# Altium PCB bmsSlavePCB_R.PcbDoc (part 1 of 3)
Units mm, origin at the board's own origin, x right, y up, seen from the top; angles counter-clockwise.
Board outline 161.93 x 135.51 mm, 2 copper layers (Top Layer, Bottom Layer); 207 components, 152 nets, 533 pads, 59 vias.
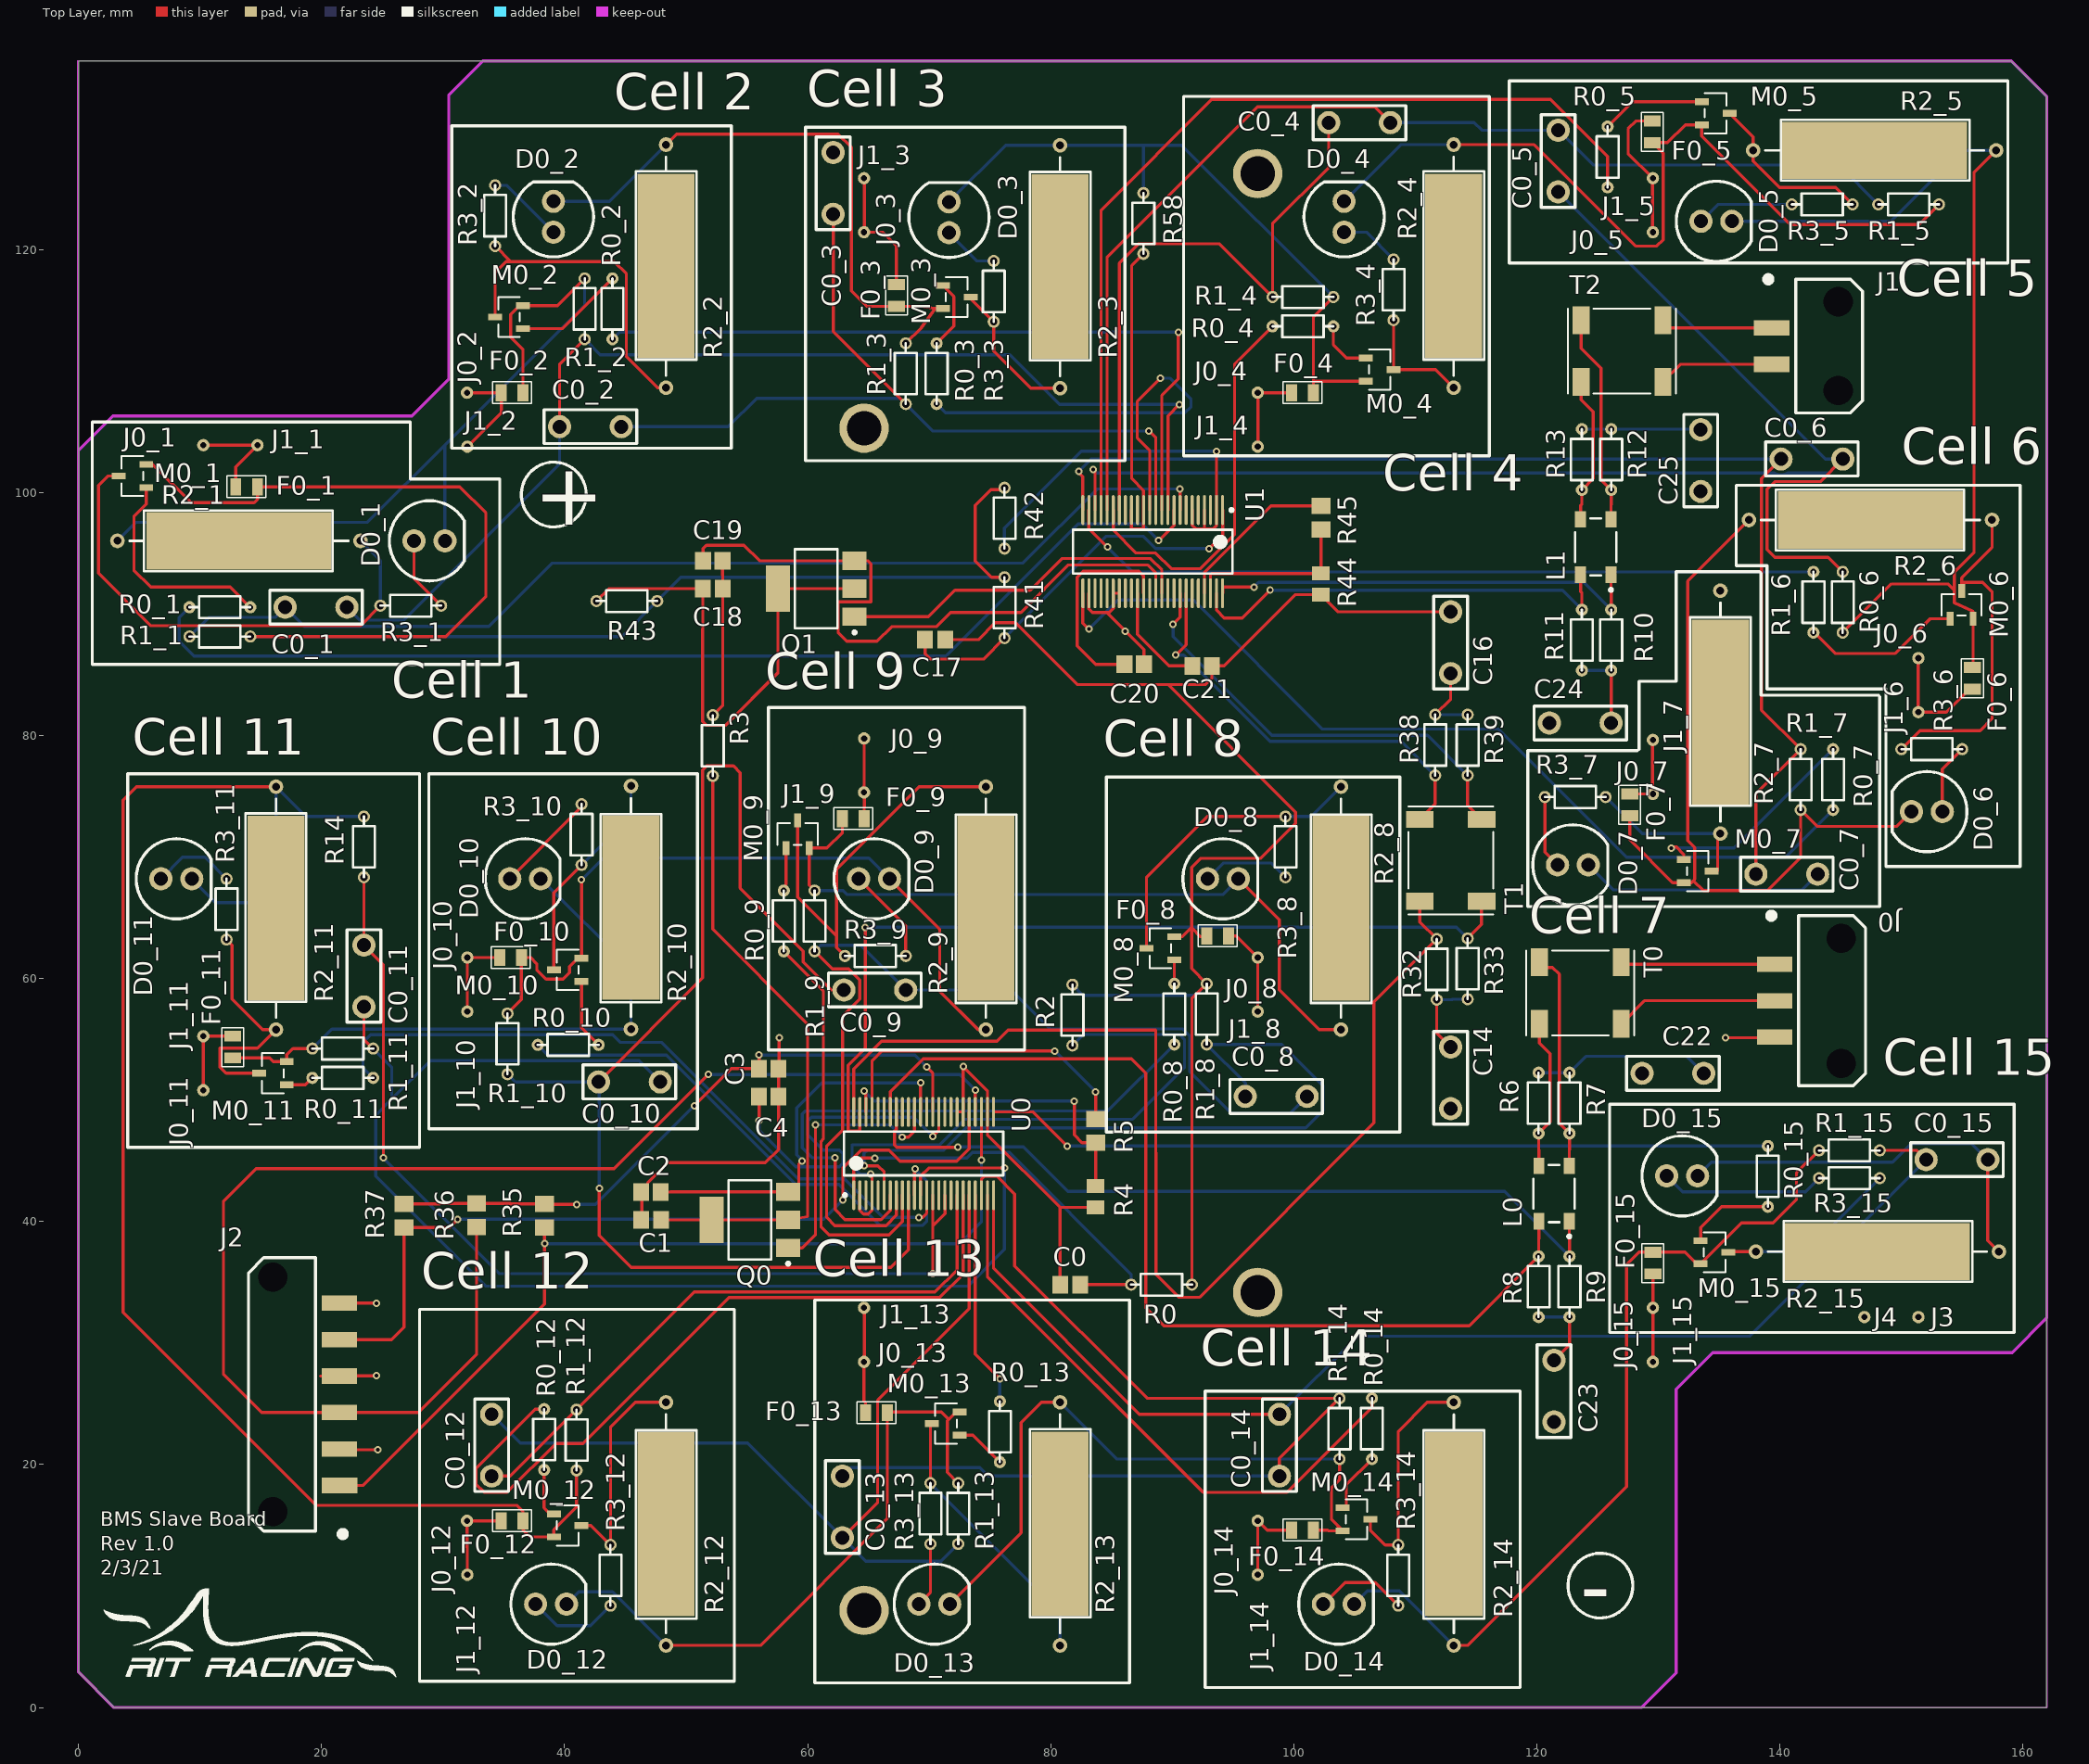
[diagram p0: Top Layer view]
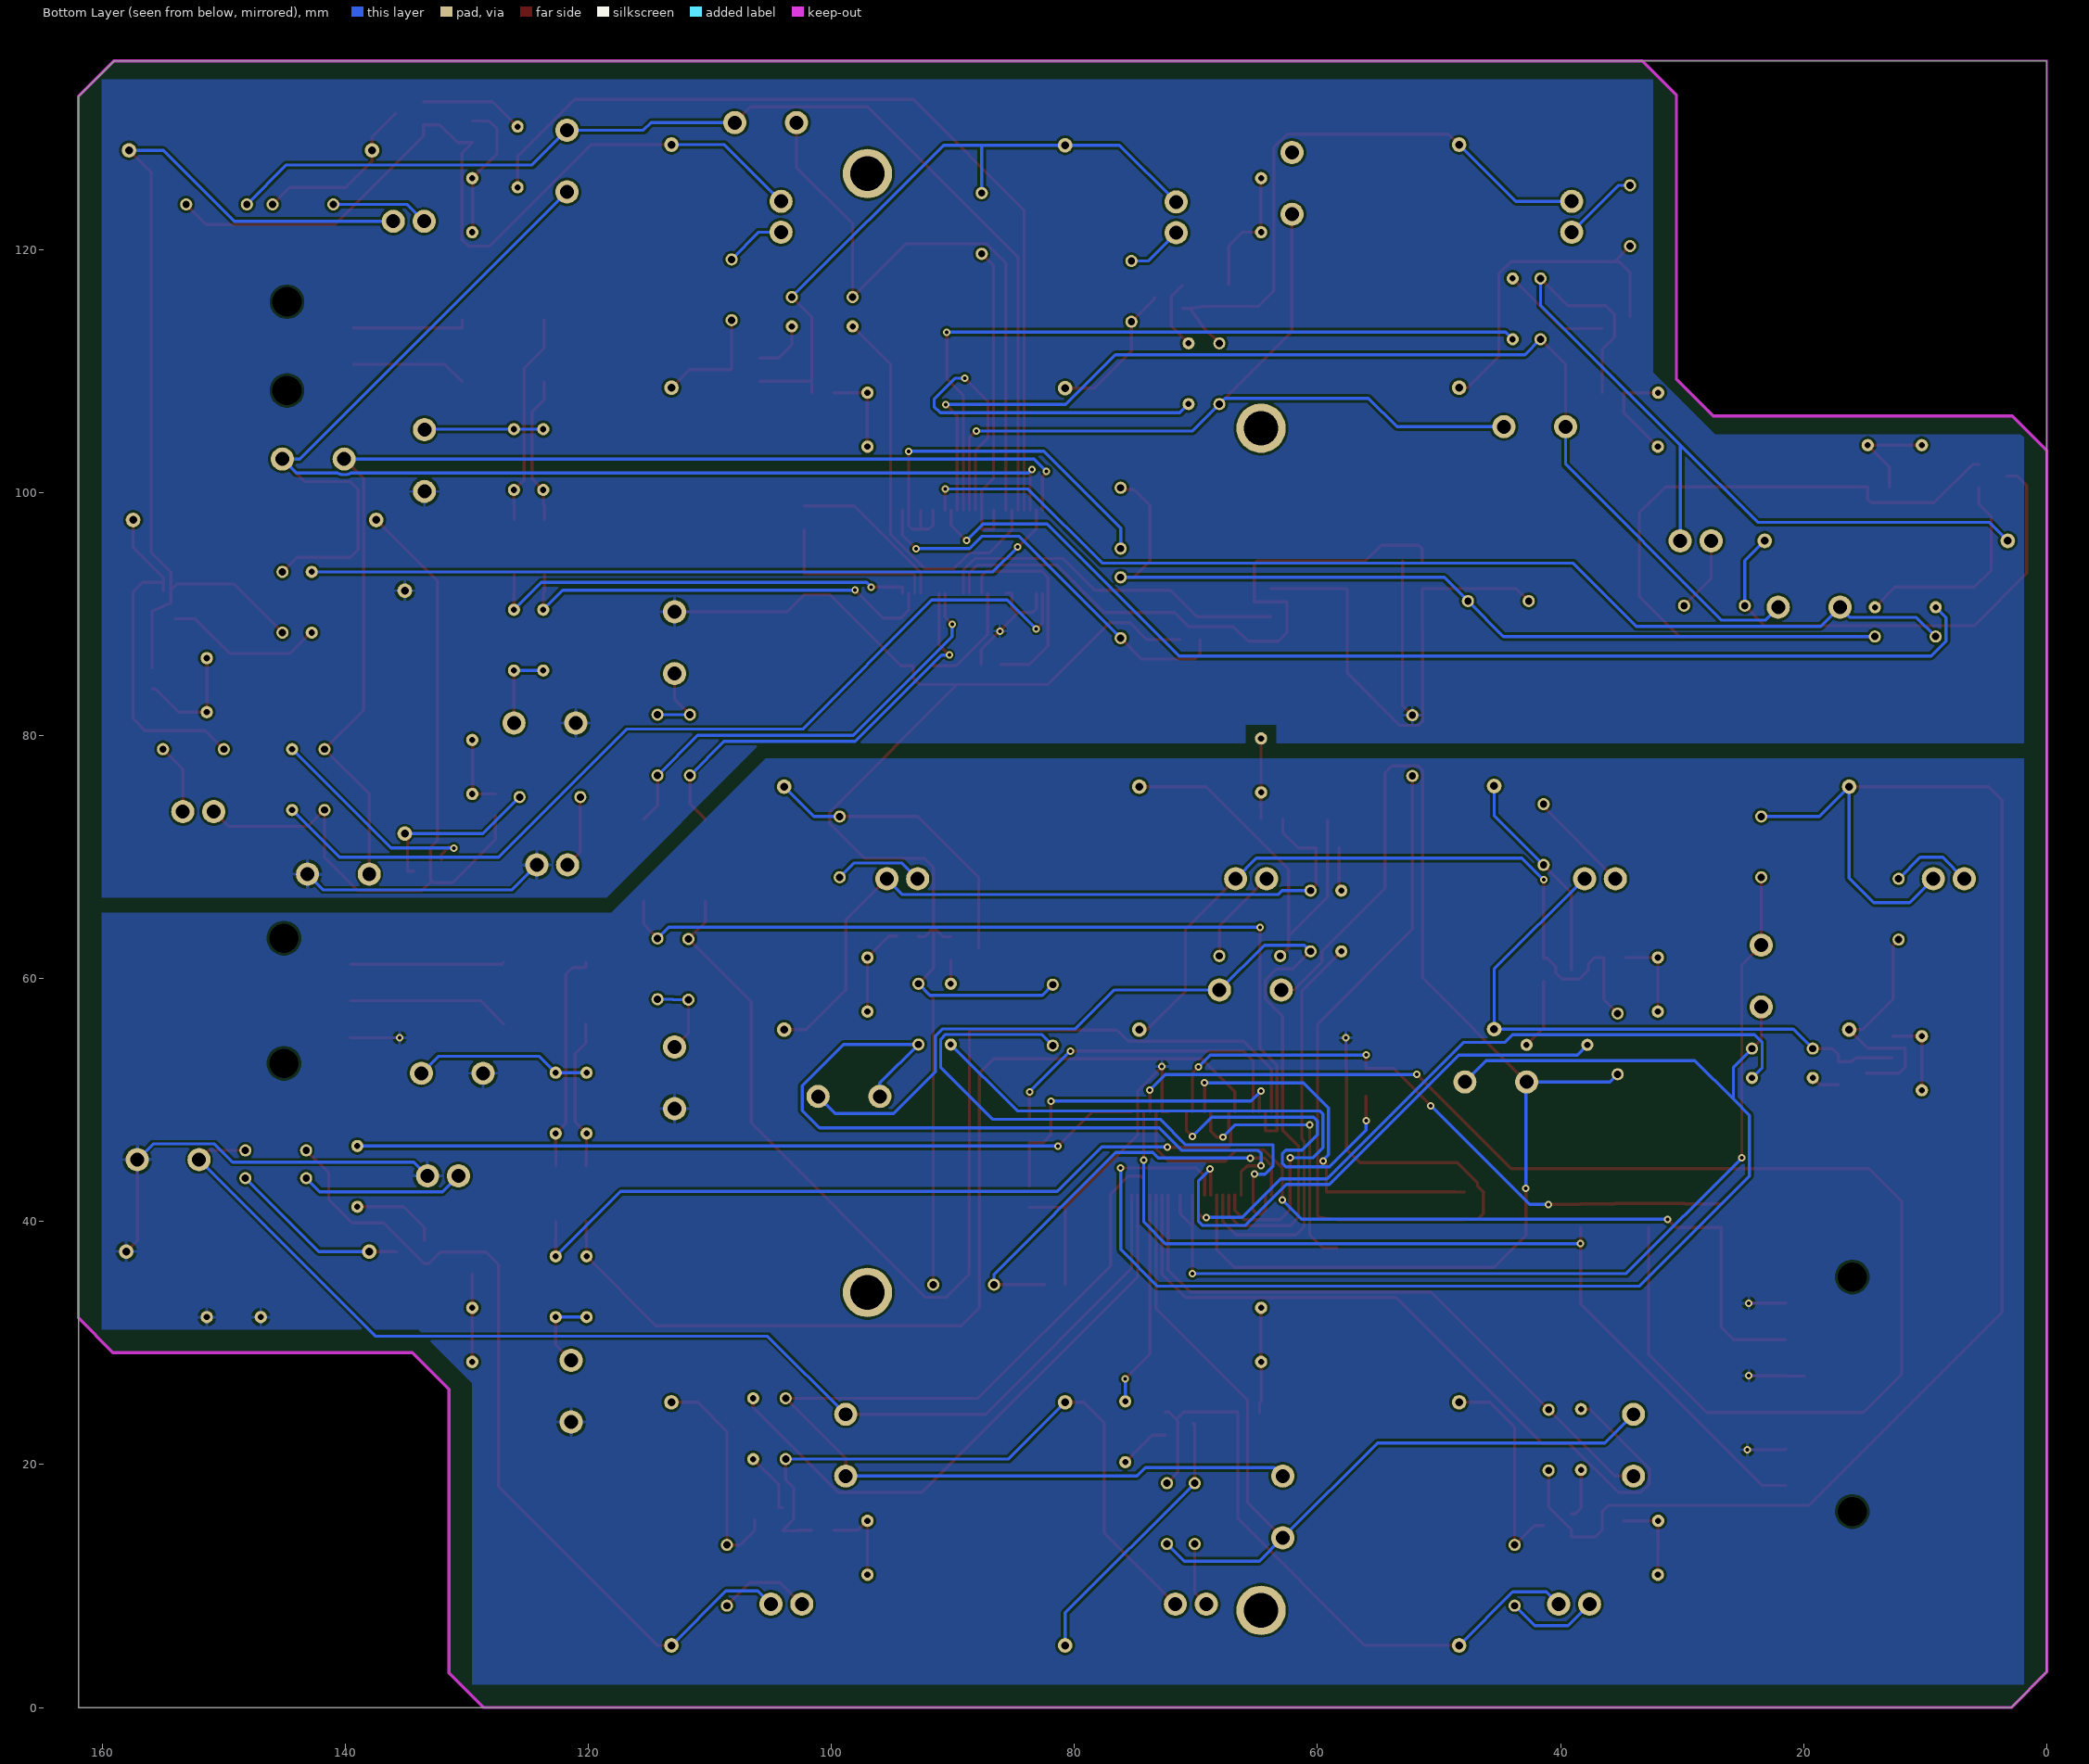
[diagram p1: Bottom Layer view, seen from below]
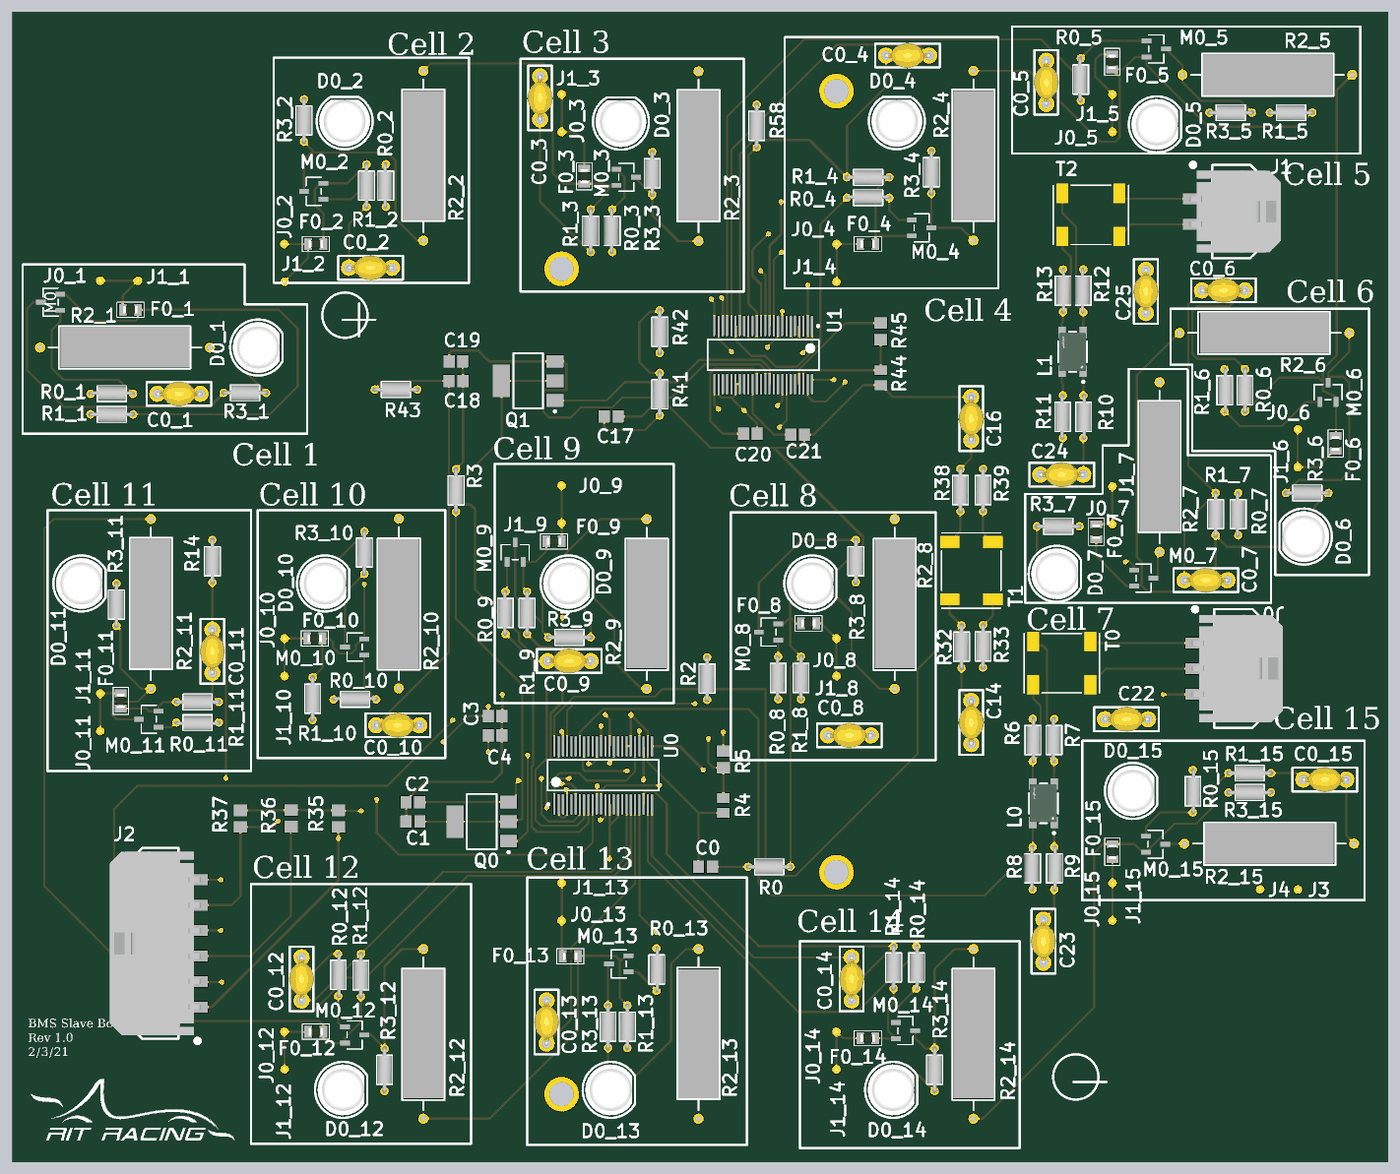
[diagram p3: 3D render of the assembled board from above, using the file's embedded part models]

## Layer stack, top to bottom
Top Solder: solder mask 0.0102, Solder Resist, Dk 3.5
Top Layer: signal copper 0.0356
Dielectric 1: dielectric 0.32, FR-4, Dk 4.8
Bottom Layer: signal copper 0.0356
Bottom Solder: solder mask 0.0102, Solder Resist, Dk 3.5

## Board outline
0,2.936 2.91,0 161.925,0 161.925,132.585 159.001,135.509 158.471,135.509 0,135.509
cut-out: -0.076,135.534 33.325,135.534 30.404,132.613 30.404,109.245 27.483,106.324 2.845,106.324 -0.076,103.403
cut-out: 161.976,-0.025 128.575,-0.025 131.496,2.896 131.496,26.264 134.417,29.185 159.055,29.185 161.976,32.106

## Design rules (kind name [scope] priority, off if disabled: settings)
Clearance [All] p1: gap=0.203 ignorepadtopadclearanceinfootprint=TRUE
PolygonConnect [All] p1: connectstyle=Relief reliefconductorwidth=0.254 reliefentries=4 polygonreliefangle="90 Angle" airgapwidth=0.254
RoomDefinition U_BalCircuitC [InComponentClass('U_BalCircuitC')] p1: confinementstyle=ConfineIn formatcopy=TRUE lockcomponents=FALSE outline 83.626,107.615 83.626,129.527 63.881,129.527 63.881,129.62 60.325,129.62 60.325,121.238 64.11,121.238 64.11,120.197 65.979,120.197 65.979,114.127 66.691,114.127 66.691,106.492 71.993,106.492 71.993,107.615
RoomDefinition U_BalCircuitK [InComponentClass('U_BalCircuitK')] p2: confinementstyle=ConfineIn formatcopy=TRUE lockcomponents=FALSE outline 87.312,60.503 87.312,64.465 90.485,64.465 90.485,71.882 98.06,71.882 98.06,74.182 101.032,74.182 101.032,76.742 106.74,76.742 106.74,54.83 102.743,54.83 102.743,48.514 94.361,48.514 94.361,53.707 88.916,53.707 88.916,60.503
RoomDefinition U_BalCircuitJ [InComponentClass('U_BalCircuitJ')] p3: confinementstyle=ConfineIn formatcopy=TRUE lockcomponents=FALSE outline 77.524,54.83 77.524,76.742 65.814,76.742 65.814,80.922 63.477,80.922 63.477,76.477 63.471,76.477 63.471,74.356 61.85,74.356 61.85,73.85 57.195,73.85 57.195,68.34 56.779,68.34 56.779,61.628 59.319,61.628 59.319,61.374 61.335,61.374 61.335,57.277 71.816,57.277 71.816,54.83
RoomDefinition U_BalCircuitI [InComponentClass('U_BalCircuitI')] p4: confinementstyle=ConfineIn formatcopy=TRUE lockcomponents=FALSE outline 49.53,49.704 49.53,53.26 48.32,53.26 48.32,76.789 42.612,76.789 42.612,75.198 40.148,75.198 40.148,71.882 33.081,71.882 33.081,62.891 30.709,62.891 30.709,56.109 34.052,56.109 34.052,51.261 41.148,51.261 41.148,49.704
RoomDefinition U_BalCircuitO [InComponentClass('U_BalCircuitO')] p5: confinementstyle=ConfineIn formatcopy=TRUE lockcomponents=FALSE outline 158.972,34.672 158.972,40.38 158.811,40.38 158.811,46.924 149.046,46.924 149.046,47.035 140.253,47.035 140.253,47.065 135.189,47.065 135.189,47.432 128.265,47.432 128.265,40.066 128.336,40.066 128.336,34.672 128.371,34.672 128.371,27.28 130.708,27.28 130.708,34.529 136.269,34.529 136.269,34.672
RoomDefinition U_BalCircuitA [InComponentClass('U_BalCircuitA')] p6: confinementstyle=ConfineIn formatcopy=TRUE lockcomponents=FALSE outline 32.131,92.329 32.131,99.695 15.9,99.695 15.9,105.055 9.118,105.055 9.118,103.327 2.476,103.327 2.476,98.866 2.252,98.866 2.252,93.158 8.288,93.158 8.288,86.884 15,86.884 15,88.773 23.749,88.773 23.749,89.297 30.574,89.297 30.574,92.329
RoomDefinition U_BalCircuitB [InComponentClass('U_BalCircuitB')] p7: confinementstyle=ConfineIn formatcopy=TRUE lockcomponents=FALSE outline 51.208,107.662 51.208,129.574 45.5,129.574 45.5,126.459 32.114,126.459 32.114,109.373 30.802,109.373 30.802,102.718 33.139,102.718 33.139,103.632 46.322,103.632 46.322,107.662
RoomDefinition U_BalCircuitH [InComponentClass('U_BalCircuitH')] p8: confinementstyle=ConfineIn formatcopy=TRUE lockcomponents=FALSE outline 4.379,64.516 4.379,71.882 13.402,71.882 13.402,76.742 19.11,76.742 19.11,64.389 25.273,64.389 25.273,56.007 25.113,56.007 25.113,50.562 17.97,50.562 17.97,50.216 11.455,50.216 11.455,49.632 9.118,49.632 9.118,54.077 9.118,64.516
RoomDefinition U_BalCircuitL [InComponentClass('U_BalCircuitL')] p9: confinementstyle=ConfineIn formatcopy=TRUE lockcomponents=FALSE outline 51.208,4.157 51.208,26.069 45.5,26.069 45.5,25.781 32.225,25.781 32.225,16.536 30.803,16.536 30.803,14.199 30.836,14.199 30.836,9.754 35.207,9.754 35.207,4.826 45.5,4.826 45.5,4.157
RoomDefinition U_BalCircuitM [InComponentClass('U_BalCircuitM')] p10: confinementstyle=ConfineIn formatcopy=TRUE lockcomponents=FALSE outline 83.626,4.157 83.626,26.069 65.812,26.069 65.812,29.616 65.812,34.061 63.475,34.061 63.475,20.701 61.087,20.701 61.087,12.319 67.183,12.319 67.183,4.826 77.918,4.826 77.918,4.157
RoomDefinition U_BalCircuitD [InComponentClass('U_BalCircuitD')] p11: confinementstyle=ConfineIn formatcopy=TRUE lockcomponents=FALSE outline 95.86,102.59 95.86,109.372 97.395,109.372 97.395,117.332 100.457,117.332 100.457,125.923 101.219,125.923 101.219,132.207 109.601,132.207 109.601,129.574 116.011,129.574 116.011,107.662 102.621,107.662 102.621,107 98.197,107 98.197,102.59
RoomDefinition U_BalCircuitE [InComponentClass('U_BalCircuitE')] p12: confinementstyle=ConfineIn formatcopy=TRUE lockcomponents=FALSE outline 158.743,125.299 158.743,131.007 136.674,131.007 136.674,133.182 132.737,133.182 132.737,131.581 128.295,131.581 128.295,131.455 119.974,131.455 119.974,123.073 128.33,123.073 128.33,120.381 131.084,120.381 131.084,118.628 138.008,118.628 138.008,122.454 153.85,122.454 153.85,125.299
RoomDefinition U_BalCircuitG [InComponentClass('U_BalCircuitG')] p13: confinementstyle=ConfineIn formatcopy=TRUE lockcomponents=FALSE outline 145.62,73.011 145.62,79.723 137.949,79.723 137.949,92.871 132.241,92.871 132.241,81.941 127.482,81.941 127.482,77.496 127.449,77.496 127.449,76.311 119.253,76.311 119.253,73.803 119.281,73.803 119.281,65.659 126.205,65.659 126.205,66.802 144.747,66.802 144.747,73.011
RoomDefinition U_BalCircuitF [InComponentClass('U_BalCircuitF')] p14: confinementstyle=ConfineIn formatcopy=TRUE lockcomponents=FALSE outline 136.491,94.875 136.491,100.583 138.43,100.583 138.43,104.521 146.812,104.521 146.812,100.583 158.403,100.583 158.403,94.875 156.921,94.875 156.921,88.776 155.843,88.776 155.843,77.613 155.768,77.613 155.768,70.043 148.844,70.043 148.844,87.603 141.494,87.603 141.494,94.875
RoomDefinition U_BalCircuitN [InComponentClass('U_BalCircuitN')] p15: confinementstyle=ConfineIn formatcopy=TRUE lockcomponents=FALSE outline 95.86,9.754 95.86,12.091 95.866,12.091 95.866,16.536 97.034,16.536 97.034,25.781 102.505,25.781 102.505,26.303 107.68,26.303 107.68,26.069 116.017,26.069 116.017,4.157 110.309,4.157 110.309,4.826 100.016,4.826 100.016,9.754
RoutingVias [All] p1: holewidth=0.305 width=0.61 viastyle="Through Hole" minholewidth=0.305 minwidth=0.61 maxholewidth=0.305 maxwidth=0.61
SolderMaskExpansion [All] p1: expansion=0.102 istentingtop=FALSE
Width [All] p1: maxlimit=0.254 minlimit=0.254 preferedwidth=0.254
30 further rules are at their usual default settings.

## Classes and differential pairs
channel class BalCircuit: U_BalCircuitA U_BalCircuitB U_BalCircuitC U_BalCircuitD U_BalCircuitE U_BalCircuitF U_BalCircuitG U_BalCircuitH U_BalCircuitI U_BalCircuitJ U_BalCircuitK U_BalCircuitL U_BalCircuitM U_BalCircuitN U_BalCircuitO U_BalCircuitP
component class U_BalCircuitO: C0_15 D0_15 F0_15 J0_15 J1_15 M0_15 R0_15 R1_15 R2_15 R3_15
component class U_BalCircuitN: C0_14 D0_14 F0_14 J0_14 J1_14 M0_14 R0_14 R1_14 R2_14 R3_14
component class U_BalCircuitM: C0_13 D0_13 F0_13 J0_13 J1_13 M0_13 R0_13 R1_13 R2_13 R3_13
component class U_BalCircuitL: C0_12 D0_12 F0_12 J0_12 J1_12 M0_12 R0_12 R1_12 R2_12 R3_12
component class U_BalCircuitK: C0_11 D0_11 F0_11 J0_11 J1_11 M0_11 R0_11 R1_11 R2_11 R3_11
component class U_BalCircuitJ: C0_10 D0_10 F0_10 J0_10 J1_10 M0_10 R0_10 R1_10 R2_10 R3_10
component class U_BalCircuitI: C0_10 D0_10 F0_10 J0_10 J1_10 M0_10 R0_10 R1_10 R2_10 R3_10
component class U_BalCircuitH: C0_11 D0_11 F0_11 J0_11 J1_11 M0_11 R0_11 R1_11 R2_11 R3_11
component class U_BalCircuitG: C0_7 D0_7 F0_7 J0_7 J1_7 M0_7 R0_7 R1_7 R2_7 R3_7
component class U_BalCircuitF: C0_6 D0_6 F0_6 J0_6 J1_6 M0_6 R0_6 R1_6 R2_6 R3_6
component class U_BalCircuitE: C0_5 D0_5 F0_5 J0_5 J1_5 M0_5 R0_5 R1_5 R2_5 R3_5
component class U_BalCircuitD: C0_4 D0_4 F0_4 J0_4 J1_4 M0_4 R0_4 R1_4 R2_4 R3_4
component class U_BalCircuitC: C0_3 D0_3 F0_3 J0_3 J1_3 M0_3 R0_3 R1_3 R2_3 R3_3
component class U_BalCircuitB: C0_2 D0_2 F0_2 J0_2 J1_2 M0_2 R0_2 R1_2 R2_2 R3_2
component class U_BalCircuitA: C0_1 D0_1 F0_1 J0_1 J1_1 M0_1 R0_1 R1_1 R2_1 R3_1
component class SpringContacts: J0_1 J0_2 J0_3 J0_4 J0_5 J0_6 J0_7 J0_10 J0_11 J0_12 J0_13 J0_14 J0_15 J1_1 J1_2 J1_3 J1_4 J1_5 J1_6 J1_7 J1_10 J1_11 J1_12 J1_13 J1_14 J1_15 J3 J4
component class Mosfets: M0_1 M0_2 M0_3 M0_4 M0_5 M0_6 M0_7 M0_10 M0_11 M0_12 M0_13 M0_14 M0_15
component class GateRes: R0_1 R0_2 R0_3 R0_4 R0_5 R0_6 R0_7 R0_10 R0_11 R0_12 R0_13 R0_14 R0_15
component class CellRes: R1_1 R1_2 R1_3 R1_4 R1_5 R1_6 R1_7 R1_10 R1_11 R1_12 R1_13 R1_14 R1_15 R14
component class CellFuses: F0_1 F0_2 F0_3 F0_4 F0_5 F0_6 F0_7 F0_10 F0_11 F0_12 F0_13 F0_14 F0_15

## Components (designator, comment, footprint, x,y, rotation, side; value= is the part's Value field where it differs from the comment)
C0 "0.1uF" CAPC2013X145X48NL20T23 81.598,34.798 r0 top
C0_1 "10nF" "Cap, 5mm TH, Ceramic" 19.558,90.551 r180 top value=Value? (schematic designator C0)
C0_2 "10nF" "Cap, 5mm TH, Ceramic" 42.131,105.41 r180 top value=Value? (schematic designator C0)
C0_3 "10nF" "Cap, 5mm TH, Ceramic" 62.103,125.429 r270 top value=Value? (schematic designator C0)
C0_4 "10nF" "Cap, 5mm TH, Ceramic" 105.41,130.429 r180 top value=Value? (schematic designator C0)
C0_5 "10nF" "Cap, 5mm TH, Ceramic" 121.752,127.264 r90 top value=Value? (schematic designator C0)
C0_6 "10nF" "Cap, 5mm TH, Ceramic" 142.621,102.743 r0 top value=Value? (schematic designator C0)
C0_7 "10nF" "Cap, 5mm TH, Ceramic" 140.556,68.58 r180 top value=Value? (schematic designator C0)
C0_8 "10nF" "Cap, 5mm TH, Ceramic" 98.552,50.292 r180 top value=Value? (schematic designator C0)
C0_9 "10nF" "Cap, 5mm TH, Ceramic" 65.526,59.055 r0 top value=Value? (schematic designator C0)
C0_10 "10nF" "Cap, 5mm TH, Ceramic" 45.339,51.482 r180 top value=Value? (schematic designator C0)
C0_11 "10nF" "Cap, 5mm TH, Ceramic" 23.495,60.198 r270 top value=Value? (schematic designator C0)
C0_12 "10nF" "Cap, 5mm TH, Ceramic" 34.003,21.59 r270 top value=Value? (schematic designator C0)
C0_13 "10nF" "Cap, 5mm TH, Ceramic" 62.865,16.51 r270 top value=Value? (schematic designator C0)
C0_14 "10nF" "Cap, 5mm TH, Ceramic" 98.812,21.59 r270 top value=Value? (schematic designator C0)
C0_15 "10nF" "Cap, 5mm TH, Ceramic" 154.559,45.085 r180 top value=Value? (schematic designator C0)
C1 "0.1uF" CAPC2013X145X48NL20T23 47.117,40.132 r180 top
C2 "1uF" CAPC2013X140X50NL20T25 47.117,42.418 r0 top
C3 "1uF" CAPC2013X140X50NL20T25 56.807,52.578 r180 top
C4 "1uF" CAPC2013X140X50NL20T25 56.807,50.292 r180 top
C14 "10nF" "Cap, 5mm TH, Ceramic" 112.903,51.816 r270 top value=Value?
C16 "10nF" "Cap, 5mm TH, Ceramic" 112.903,87.63 r270 top value=Value?
C17 "0.1uF" CAPC2013X145X48NL20T23 70.485,87.884 r180 top
C18 "0.1uF" CAPC2013X145X48NL20T23 52.197,92.075 r0 top
C19 "1uF" CAPC2013X140X50NL20T25 52.197,94.361 r180 top
C20 "1uF" CAPC2013X140X50NL20T25 86.868,85.852 r180 top
C21 "1uF" CAPC2013X140X50NL20T25 92.456,85.725 r180 top
C22 "10nF" "Cap, 5mm TH, Ceramic" 131.191,52.197 r0 top value=Value?
C23 "10nF" "Cap, 5mm TH, Ceramic" 121.412,26.035 r90 top value=Value?
C24 "10nF" "Cap, 5mm TH, Ceramic" 123.571,81.026 r0 top value=Value?
C25 "10nF" "Cap, 5mm TH, Ceramic" 133.477,102.616 r90 top value=Value?
D0_1 "Green" "LED, TH" 28.89,96.012 r0 top (schematic designator D0)
D0_2 "Green" "LED, TH" 39.083,122.682 r90 top (schematic designator D0)
D0_3 "Green" "LED, TH" 71.628,122.635 r90 top (schematic designator D0)
D0_4 "Green" "LED, TH" 104.14,122.682 r90 top (schematic designator D0)
D0_5 "Green" "LED, TH" 134.767,122.311 r0 top (schematic designator D0)
D0_6 "Green" "LED, TH" 152.085,73.726 r180 top (schematic designator D0)
D0_7 "Green" "LED, TH" 122.964,69.342 r0 top (schematic designator D0)
D0_8 "Green" "LED, TH" 94.168,68.199 r0 top (schematic designator D0)
D0_9 "Green" "LED, TH" 65.466,68.199 r0 top (schematic designator D0)
D0_10 "Green" "LED, TH" 36.764,68.199 r0 top (schematic designator D0)
D0_11 "Green" "LED, TH" 8.062,68.199 r0 top (schematic designator D0)
D0_12 "Green" "LED, TH" 38.89,8.509 r0 top (schematic designator D0)
D0_13 "Green" "LED, TH" 70.424,8.509 r0 top (schematic designator D0)
D0_14 "Green" "LED, TH" 103.699,8.509 r0 top (schematic designator D0)
D0_15 "Green" "LED, TH" 131.948,43.749 r0 top (schematic designator D0)
F0_1 "1A" "Fuse, 0805" 13.843,100.457 r180 top (schematic designator F0)
F0_2 "1A" "Fuse, 0805" 35.687,108.204 r180 top (schematic designator F0)
F0_3 "1A" "Fuse, 0805" 67.31,116.205 r90 top (schematic designator F0)
F0_4 "1A" "Fuse, 0805" 100.717,108.204 r180 top (schematic designator F0)
F0_5 "1A" "Fuse, 0805" 129.499,129.677 r90 top (schematic designator F0)
F0_6 "1A" "Fuse, 0805" 155.829,84.709 r270 top (schematic designator F0)
F0_7 "1A" "Fuse, 0805" 127.635,74.289 r90 top (schematic designator F0)
F0_8 "1A" "Fuse, 0805" 93.726,63.5 r0 top (schematic designator F0)
F0_9 "1A" "Fuse, 0805" 63.754,73.152 r0 top (schematic designator F0)
F0_10 "1A" "Fuse, 0805" 35.56,61.722 r180 top (schematic designator F0)
F0_11 "1A" "Fuse, 0805" 12.7,54.356 r90 top (schematic designator F0)
F0_12 "1A" "Fuse, 0805" 35.687,15.367 r180 top (schematic designator F0)
F0_13 "1A" "Fuse, 0805" 65.659,24.257 r180 top (schematic designator F0)
F0_14 "1A" "Fuse, 0805" 100.711,14.605 r180 top (schematic designator F0)
F0_15 "1A" "Fuse, 0805" 129.54,36.576 r270 top (schematic designator F0)
J0 "43650-0309" 43650-0309 145.034,58.166 r90 top
J0_1 "0985-0-15-20-71-14-11-0" 0908-6 10.287,103.886 r0 top (schematic designator J0)
J0_2 "0985-0-15-20-71-14-11-0" 0908-6 31.971,108.204 r0 top (schematic designator J0)
J0_3 "0985-0-15-20-71-14-11-0" 0908-6 64.643,121.412 r90 top (schematic designator J0)
J0_4 "0985-0-15-20-71-14-11-0" 0908-6 97.028,108.204 r180 top (schematic designator J0)
J0_5 "0985-0-15-20-71-14-11-0" 0908-6 129.54,121.412 r0 top (schematic designator J0)
J0_6 "0985-0-15-20-71-14-11-0" 0908-6 151.384,86.36 r0 top (schematic designator J0)
J0_7 "0985-0-15-20-71-14-11-0" 0908-6 129.54,75.184 r0 top (schematic designator J0)
J0_8 "0985-0-15-20-71-14-11-0" 0908-6 97.028,61.722 r0 top (schematic designator J0)
J0_9 "0985-0-15-20-71-14-11-0" 0908-6 64.646,79.753 r0 top (schematic designator J0)
J0_10 "0985-0-15-20-71-14-11-0" 0908-6 32.004,61.722 r90 top (schematic designator J0)
J0_11 "0985-0-15-20-71-14-11-0" 0908-6 10.287,50.8 r0 top (schematic designator J0)
J0_12 "0985-0-15-20-71-14-11-0" 0908-6 31.971,15.367 r90 top (schematic designator J0)
J0_13 "0985-0-15-20-71-14-11-0" 0908-6 64.643,28.448 r180 top (schematic designator J0)
J0_14 "0985-0-15-20-71-14-11-0" 0908-6 97.034,15.367 r90 top (schematic designator J0)
J0_15 "0985-0-15-20-71-14-11-0" 0908-6 129.54,32.893 r0 top (schematic designator J0)
J1 "43650-0209" 43650-0209 144.789,112.038 r90 top
J1_1 "0985-0-15-20-71-14-11-0" 0908-6 14.732,103.886 r0 top (schematic designator J1)
J1_2 "0985-0-15-20-71-14-11-0" 0908-6 32.004,103.759 r0 top (schematic designator J1)
J1_3 "0985-0-15-20-71-14-11-0" 0908-6 64.643,125.857 r90 top (schematic designator J1)
J1_4 "0985-0-15-20-71-14-11-0" 0908-6 97.028,103.759 r180 top (schematic designator J1)
J1_5 "0985-0-15-20-71-14-11-0" 0908-6 129.54,125.857 r0 top (schematic designator J1)
J1_6 "0985-0-15-20-71-14-11-0" 0908-6 151.384,81.915 r0 top (schematic designator J1)
J1_7 "0985-0-15-20-71-14-11-0" 0908-6 129.54,79.629 r0 top (schematic designator J1)
J1_8 "0985-0-15-20-71-14-11-0" 0908-6 97.028,57.277 r0 top (schematic designator J1)
J1_9 "0985-0-15-20-71-14-11-0" 0908-6 64.64,75.308 r0 top (schematic designator J1)
J1_10 "0985-0-15-20-71-14-11-0" 0908-6 32.004,57.277 r90 top (schematic designator J1)
J1_11 "0985-0-15-20-71-14-11-0" 0908-6 10.287,55.245 r0 top (schematic designator J1)
J1_12 "0985-0-15-20-71-14-11-0" 0908-6 32.004,10.922 r90 top (schematic designator J1)
J1_13 "0985-0-15-20-71-14-11-0" 0908-6 64.643,32.893 r180 top (schematic designator J1)
J1_14 "0985-0-15-20-71-14-11-0" 0908-6 97.028,10.922 r90 top (schematic designator J1)
J1_15 "0985-0-15-20-71-14-11-0" 0908-6 129.54,28.448 r0 top (schematic designator J1)
J2 "43650-0609" 43650-0609 16.002,25.781 r270 top locked
J3 "0985-0-15-20-71-14-11-0" 0908-6 151.384,32.131 r180 top
J4 "0985-0-15-20-71-14-11-0" 0908-6 146.939,32.131 r90 top
L0 "DLW43SH101XK2L" FP-DLW43-0_2-t2_6-e0_6-MFG 121.412,42.291 r90 top
L1 "DLW43SH101XK2L" FP-DLW43-0_2-t2_6-e0_6-MFG 124.841,95.504 r90 top
M0_1 "NDS332P" SOT23_527AG_ONS 4.445,101.346 r90 top (schematic designator M0)
M0_2 "NDS332P" SOT23_527AG_ONS 35.433,114.427 r90 top (schematic designator M0)
M0_3 "NDS332P" SOT23_527AG_ONS 72.263,116.078 r270 top (schematic designator M0)
M0_4 "NDS332P" SOT23_527AG_ONS 107.061,110.109 r270 top (schematic designator M0)
M0_5 "NDS332P" SOT23_527AG_ONS 134.706,131.201 r270 top (schematic designator M0)
M0_6 "NDS332P" SOT23_527AG_ONS 154.94,90.744 r0 top (schematic designator M0)
M0_7 "NDS332P" SOT23_527AG_ONS 133.223,68.834 r270 top (schematic designator M0)
M0_8 "NDS332P" SOT23_527AG_ONS 89.027,62.484 r90 top (schematic designator M0)
M0_9 "NDS332P" SOT23_527AG_ONS 59.176,71.882 r0 top (schematic designator M0)
M0_10 "NDS332P" SOT23_527AG_ONS 40.259,60.706 r90 top (schematic designator M0)
M0_11 "NDS332P" SOT23_527AG_ONS 16.002,52.197 r90 top (schematic designator M0)
M0_12 "NDS332P" SOT23_527AG_ONS 40.259,14.986 r270 top (schematic designator M0)
M0_13 "NDS332P" SOT23_527AG_ONS 71.374,23.368 r90 top (schematic designator M0)
M0_14 "NDS332P" SOT23_527AG_ONS 105.156,15.494 r270 top (schematic designator M0)
M0_15 "NDS332P" SOT23_527AG_ONS 134.62,37.465 r270 top (schematic designator M0)
Q0 "NSV1C201MZ4T1G" ONSC-SOT-223-4-318E-04_V 55.245,40.132 r180 top
Q1 "NSV1C201MZ4T1G" ONSC-SOT-223-4-318E-04_V 60.706,92.075 r180 top
R0 "100R 1/2W" TH100R 86.614,34.798 r0 top
R0_1 "3.3KR" Th3.3KR 9.144,90.551 r0 top (schematic designator R0)
R0_2 "3.3KR" Th3.3KR 43.942,112.602 r90 top (schematic designator R0)
R0_3 "3.3KR" Th3.3KR 70.612,107.268 r90 top (schematic designator R0)
R0_4 "3.3KR" Th3.3KR 98.251,113.665 r0 top (schematic designator R0)
R0_5 "3.3KR" Th3.3KR 125.816,125.105 r90 top (schematic designator R0)
R0_6 "3.3KR" Th3.3KR 142.748,93.458 r270 top (schematic designator R0)
R0_7 "3.3KR" Th3.3KR 144.366,73.867 r90 top (schematic designator R0)
R0_8 "3.3KR" Th3.3KR 90.17,54.563 r90 top (schematic designator R0)
R0_9 "3.3KR" Th3.3KR 58.039,62.23 r90 top (schematic designator R0)
R0_10 "3.3KR" Th3.3KR 37.799,54.53 r0 top (schematic designator R0)
R0_11 "3.3KR" Th3.3KR 24.257,51.816 r180 top (schematic designator R0)
R0_12 "3.3KR" Th3.3KR 38.321,24.558 r270 top (schematic designator R0)
R0_13 "3.3KR" Th3.3KR 75.819,25.193 r270 top (schematic designator R0)
R0_14 "3.3KR" Th3.3KR 106.426,25.447 r270 top (schematic designator R0)
R0_15 "3.3KR" Th3.3KR 138.999,46.209 r270 top (schematic designator R0)
R1_1 "100R" Th100R 9.144,88.138 r0 top (schematic designator R1)
R1_2 "100R" Th100R 41.656,112.602 r90 top (schematic designator R1)
R1_3 "100R" Th100R 68.072,107.268 r90 top (schematic designator R1)
R1_4 "100R" Th100R 98.251,116.078 r0 top (schematic designator R1)
R1_5 "100R" Th100R 148.082,123.698 r0 top (schematic designator R1)
R1_6 "100R" Th100R 145.161,93.458 r270 top (schematic designator R1)
R1_7 "100R" Th100R 141.699,78.867 r270 top (schematic designator R1)
R1_8 "100R" Th100R 92.837,54.563 r90 top (schematic designator R1)
R1_9 "100R" Th100R 60.573,62.23 r90 top (schematic designator R1)
R1_10 "100R" Th100R 35.306,52.117 r90 top (schematic designator R1)
R1_11 "100R" Th100R 24.257,54.229 r180 top (schematic designator R1)
R1_12 "100R" Th100R 40.988,24.511 r270 top (schematic designator R1)
R1_13 "100R" Th100R 72.39,13.462 r90 top (schematic designator R1)
R1_14 "100R" Th100R 103.759,25.447 r270 top (schematic designator R1)
R1_15 "100R" Th100R 148.209,45.847 r180 top (schematic designator R1)
R2 "100R" TH100R 81.788,54.483 r90 top
R2_1 "16R 2W" TH16R 3.208,96.012 r0 top (schematic designator R2)
R2_2 "16R 2W" TH16R 48.354,128.618 r270 top (schematic designator R2)
R2_3 "16R 2W" TH16R 80.772,128.571 r270 top (schematic designator R2)
R2_4 "16R 2W" TH16R 113.157,128.618 r270 top (schematic designator R2)
R2_5 "16R 2W" TH16R 157.787,128.153 r180 top (schematic designator R2)
R2_6 "16R 2W" TH16R 137.447,97.729 r0 top (schematic designator R2)
R2_7 "16R 2W" TH16R 135.095,91.915 r270 top (schematic designator R2)
R2_8 "16R 2W" TH16R 103.886,55.786 r90 top (schematic designator R2)
R2_9 "16R 2W" TH16R 74.67,55.786 r90 top (schematic designator R2)
R2_10 "16R 2W" TH16R 45.466,55.833 r90 top (schematic designator R2)
R2_11 "16R 2W" TH16R 16.256,75.786 r270 top (schematic designator R2)
R2_12 "16R 2W" TH16R 48.354,5.113 r90 top (schematic designator R2)
R2_13 "16R 2W" TH16R 80.772,25.113 r270 top (schematic designator R2)
R2_14 "16R 2W" TH16R 113.163,5.113 r90 top (schematic designator R2)
R2_15 "16R 2W" TH16R 158.016,37.526 r180 top (schematic designator R2)
R3 "100R 1/2W" Th100R 52.197,76.661 r90 top
R3_1 "180R" Th100R 24.845,90.678 r0 top (schematic designator R3)
R3_2 "180R" Th100R 34.29,120.269 r90 top (schematic designator R3)
R3_3 "180R" Th100R 75.311,114.046 r90 top (schematic designator R3)
R3_4 "180R" Th100R 108.204,114.173 r90 top (schematic designator R3)
R3_5 "180R" Th100R 145.97,123.698 r180 top (schematic designator R3)
R3_6 "180R" Th100R 149.987,78.867 r0 top (schematic designator R3)
R3_7 "180R" Th100R 125.65,74.93 r180 top (schematic designator R3)
R3_8 "180R" Th100R 99.314,73.326 r270 top (schematic designator R3)
R3_9 "180R" Th100R 63.072,61.849 r0 top (schematic designator R3)
R3_10 "180R" Th100R 41.402,69.342 r90 top (schematic designator R3)
R3_11 "180R" Th100R 12.192,63.199 r90 top (schematic designator R3)
R3_12 "180R" Th100R 43.782,13.382 r270 top (schematic designator R3)
R3_13 "180R" Th100R 70.104,18.462 r270 top (schematic designator R3)
R3_14 "180R" Th100R 108.591,13.382 r270 top (schematic designator R3)
R3_15 "180R" Th100R 148.209,43.561 r180 top (schematic designator R3)
R4 "1200R 5% 0805" RESC2013X70X40NL20T20 83.693,42.037 r90 top
R5 "820R" RESC2013X70X40ML20T20 83.693,47.457 r90 top
R6 "300R" Th300R 120.142,52.244 r270 top
R7 "300R" Th300R 122.682,47.244 r90 top
R8 "62R" Th62R 120.142,32.131 r90 top
R9 "62R" Th62R 122.682,37.131 r270 top
R10 "62R" Th62R 126.111,90.344 r270 top
R11 "62R" Th62R 123.698,85.344 r90 top
R12 "300R" Th300R 126.111,100.203 r90 top
R13 "300R" Th300R 123.698,105.203 r270 top
R14 "100R" TH100R 23.495,68.326 r90 top
R32 "100R 1/2W" TH100R 111.76,58.246 r90 top
R33 "100R 1/2W" TH100R 114.3,63.293 r270 top
R35 "10kR" RESC2013X70X40ML20T20 38.354,40.472 r90 top
R36 "10kR" RESC2013X70X40ML20T20 32.766,40.513 r90 top
R37 "10kR" RESC2013X70X40ML20T20 26.797,40.472 r90 top
R38 "100R 1/2W" TH100R 111.633,76.708 r90 top
R39 "100R 1/2W" TH100R 114.3,81.708 r270 top
R41 "100R 1/2W" TH100R 76.2,88.011 r90 top
R42 "100R" TH100R 76.2,95.377 r90 top
R43 "100R 1/2W" TH100R 42.625,91.059 r0 top
R44 "1200R 5% 0805" RESC2013X70X40NL20T20 102.235,92.456 r90 top
R45 "820R" RESC2013X70X40ML20T20 102.235,97.917 r90 top
R58 "100R" TH100R 87.63,119.634 r90 top
T0 "PE-68386NLT" PE-68386NL_PUL 123.571,58.801 r180 top
T1 "PE-68386NLT" PE-68386NL_PUL 112.903,69.723 r90 top
T2 "PE-68386NLT" PE-68386NL_PUL 127,111.633 r0 top
U0 "LTC6804HG-1#TRPBF" LT-G-48_M 69.545,45.589 r90 top
U1 "LTC6804HG-1#TRPBF" LT-G-48_M 88.392,95.123 r270 top locked

## Footprints (in the part's own frame and the unit in brackets; to place one, negate y for a bottom-side part, rotate by r counter-clockwise, add the part's x,y. Pads: shape width x height; smd on the part's side, far side on the other; paste and mask are expansions set on the pad)
0908-6 [mil] "Mill-Max Spring-Loaded Contact"
  round 40 hole 20: 0(0,0)
  body extent -36,-36 36,36, height 50
43650-0209 [mm] "Molex 2 Position Board Header, Right Angle"
  rect 1.27x2.92 smd: 1(1.5,5.47) 2(-1.5,5.47)
  round 0 hole 2.41 unplated: ""(-3.65,0) ""(3.65,0)
  silkscreen extent -5.5,-2 5.7,5.95, body extent -4.82,-4.6 4.82,6.14, height 5.64
43650-0309 [mm] "Molex 3 Position Board Header, Right Angle"
  rect 1.27x2.92 smd: 1(3,5.47) 2(0,5.47) 3(-3,5.47)
  round 0 hole 2.41 unplated: ""(-5.15,0) ""(5.15,0)
  silkscreen extent -7,-2 7.2,5.95, body extent -6.32,-4.6 6.33,6.14, height 5.64
43650-0609 [mm] "Molex 6 Position Board Header, Right Angle"
  rect 1.27x2.92 smd: 1(7.5,5.5) 2(4.5,5.47) 3(1.5,5.47) 4(-1.5,5.47) 5(-4.5,5.47) 6(-7.5,5.47)
  round 0 hole 2.41 unplated: ""(-9.65,0) ""(9.65,0)
  silkscreen extent -11.25,-2 11.7,5.95, body extent -10.82,-4.6 10.82,6.14, height 5.64
"Cap, 5mm TH, Ceramic" [mil] "Through Hole Cap, Ceramic"
  round 75 hole 45: 1(-100,0) 2(100,0)
  silkscreen extent -150,-55 150,55, body extent -109,-59 109,59, height 176
CAPC2013X140X50NL20T25 [mm] "Chip Capacitor, 2-Leads, Body 2.00x1.25mm, IPC Medium Density"
  rect 1.3x1.45 smd: 1(-0.8,0) 2(0.8,0)
  body extent -1.1,-0.72 1.1,0.72, height 1.4
CAPC2013X145X48NL20T23 [mm] "Chip Capacitor, 2-Leads, Body 2.00x1.25mm, IPC Medium Density"
  rect 1.3x1.45 smd: 1(-0.825,0) 2(0.825,0)
  body extent -1.1,-0.72 1.1,0.72, height 1.45
FP-DLW43-0_2-t2_6-e0_6-MFG [mm]
  rect 1.35x0.9 smd paste+0 mask+0: 1(-2.275,-1.25) 2(2.275,-1.25) 3(2.275,1.25) 4(-2.275,1.25)
  silkscreen extent -3.65,-1.7 2.35,1.7, body extent -2.25,-1.6 2.25,1.6, height 2.8
"Fuse, 0805" [mm] "Generic 0805 SMD Fuse"
  rect 0.902x1.397 smd: 1(-0.895,0) 2(0.895,0)
  silkscreen extent -1.6,-0.9 1.6,0.9, body extent -0.85,-0.45 0.85,0.45, height 0.55
"LED, TH" [mil] "Through Hole LED"
  round 75 hole 45: 1(-50,0) 2(50,0)
  silkscreen extent -130,-130 113,130, body extent -118,-118 98,118, height 346
LT-G-48_M [mm] "SOP, 48-Leads, Body 13.1x5.6mm, Pitch 0.5mm, IPC Low Density"
  oval 2.45x0.25 smd: 1(-3.425,5.75) 2(-3.425,5.25) 3(-3.425,4.75) 4(-3.425,4.25) 5(-3.425,3.75) 6(-3.425,3.25) 7(-3.425,2.75) 8(-3.425,2.25) 9(-3.425,1.75) 10(-3.425,1.25) 11(-3.425,0.75) 12(-3.425,0.25) 13(-3.425,-0.25) 14(-3.425,-0.75) 15(-3.425,-1.25) 16(-3.425,-1.75) 17(-3.425,-2.25) 18(-3.425,-2.75) 19(-3.425,-3.25) 20(-3.425,-3.75) 21(-3.425,-4.25) 22(-3.425,-4.75) 23(-3.425,-5.25) 24(-3.425,-5.75) 25(3.425,-5.75) 26(3.425,-5.25) 27(3.425,-4.75) 28(3.425,-4.25) 29(3.425,-3.75) 30(3.425,-3.25) 31(3.425,-2.75) 32(3.425,-2.25) 33(3.425,-1.75) 34(3.425,-1.25) 35(3.425,-0.75) 36(3.425,-0.25) 37(3.425,0.25) 38(3.425,0.75) 39(3.425,1.25) 40(3.425,1.75) 41(3.425,2.25) 42(3.425,2.75) 43(3.425,3.25) 44(3.425,3.75) 45(3.425,4.25) 46(3.425,4.75) 47(3.425,5.25) 48(3.425,5.75)
  silkscreen extent -3.55,-6.55 1.8,6.6, body extent -2.8,-6.55 2.8,6.55, height 2
ONSC-SOT-223-4-318E-04_V [mm] "SOT223, 4-Leads, Body 6.5x3.5mm, Pitch 2.3mm"
  rect 2x1.5 smd: 1(-3.15,2.3) 2(-3.15,0) 3(-3.15,-2.3)
  rect 2x3.8 smd: 4(3.15,0)
  silkscreen extent -3.27,-3.25 1.75,3.72, body extent -1.75,-3.25 1.75,3.25, height 1.75
PE-68386NL_PUL [mil]
  rect 55x90 smd paste-27.5 mask+0: 1(-132.5,100) 2(-132.5,-100) 3(132.5,-100) 4(132.5,100)
  silkscreen extent -175,-138 175,138, body extent 0,0 10,10, height 10
RESC2013X70X40ML20T20 [mm] "Chip Resistor, 2-Leads, Body 2.00x1.25mm, IPC Low Density"
  rect 1.35x1.55 smd: 1(-0.975,0) 2(0.975,0)
  body extent -1.1,-0.72 1.1,0.72, height 0.7
RESC2013X70X40NL20T20 [mm] "Chip Resistor, 2-Leads, Body 2.00x1.25mm, IPC Medium Density"
  rect 1.15x1.45 smd: 1(-0.875,0) 2(0.875,0)
  body extent -1.1,-0.72 1.1,0.72, height 0.7
SOT23_527AG_ONS [mil]
  rect 22x45 smd paste+0 mask+0: 1(-37.4,-45) 2(37.4,-45) 3(0,45)
  silkscreen extent -65,-35 65,35, body extent -60,-30 60,30, height 30
Th3.3KR [mm]
  round 1 hole 0.5: 1(0,0) 2(5,0)
  silkscreen extent 0,-0.9 5,0.9, body extent -0.2,-0.75 5.2,0.94, height 1.85
TH16R [mm]
  round 1.2 hole 0.65: 1(0,0) 2(20,0)
  rect 15.2x4.7 smd: X(10,0)
  silkscreen extent 1,-2.5 19,2.5
Th62R [mm]
  round 1 hole 0.5: 1(0,0) 2(5,0)
  silkscreen extent 0,-0.9 5,0.9, body extent -0.2,-0.75 5.2,0.94, height 1.85
TH100R [mm] "1/8W Thruhole"
  round 1 hole 0.6: 1(0,0) 2(5,0)
  silkscreen extent 0,-0.9 5,0.9, body extent -0.22,-0.9 5.23,0.89, height 1.9
Th100R [mm] "1/8W Thruhole"
  round 1 hole 0.6: 1(0,0) 2(5,0)
  silkscreen extent 0,-0.9 5,0.9, body extent -0.22,-0.9 5.23,0.89, height 1.9
Th300R [mm]
  round 1 hole 0.5: 1(0,0) 2(5,0)
  silkscreen extent 0,-0.9 5,0.9, body extent -0.2,-0.75 5.2,0.94, height 1.85

## Part data
C0 C1 C17 C18: library part CMP-2007-01705-1, Manufacturer=Vitramon, Part Number=VJ0805Y104KXAMR
C0_1 C0_2 C0_3 C0_4 C0_5 C0_6 C0_7 C0_8 C0_9 C0_10 C0_11 C0_12 C0_13 C0_14 C0_15 C14 C16 C22 C23 C24 C25: library part "Cap, 5MM TH, Ceramic", "Generic Cap, 5MM TH, Ceramic", Published=22Oct2016, Publisher=T.Tallo, Status=Active, TargetLibrary=RITRacing-Passives
C2 C3 C4 C19 C20 C21: library part CMP-1036-04765-2, Manufacturer="AVX Interconnect / Elco", Part Number=08055G105ZAT2A
D0_1 D0_2 D0_3 D0_4 D0_5 D0_6 D0_7 D0_8 D0_9 D0_10 D0_11 D0_12 D0_13 D0_14 D0_15: library part TLHG6400CS12Z, "LED Uni-Color Green 565nm 2-Pin T-1 3/4 T/R", Case/Package=Radial, Forward Current=30mA, Forward Voltage=2.4V, Manufacturer 1="Vishay Semiconductors", Max Operating Temperature=100°C, Min Operating Temperature=-40°C, Power Dissipation=100mW, Reverse Voltage=15V, Test Current=10mA, Category=LEDs, Color=Green, ComponentLink1Description=https://datasheet.ciiva.com/26262/tlhg640-26262876.pdf?src-supplier=Avnet+Europe, ComponentLink1URL=https://datasheet.ciiva.com/26262/tlhg640-26262876.pdf?src-supplier=Avnet+Europe, Depth=5.8mm, Dominant Wavelength=569nm, Height=9mm, Length=5.8mm, Lens Size=5mm, Lens Style=Round,Domed,Diffused,Colored,Circular, Lens Transparency=Diffused, Luminous Intensity=10mcd, Manufacturer Part Number 1=TLHG6400CS12Z, Mount="Through Hole", Number of Elements=1, Number of LEDs=1, Number of Pins=2, Packaging="Tape and Reel", Pricing 1="1=0.46000, 10=0.28000, 100=0.16120 (USD)", Radiation Hardening=No, RoHS=Yes, Stock 1=4186, Supplier 1=Digi-Key, Viewing Angle=60°
F0_1 F0_2 F0_3 F0_4 F0_5 F0_6 F0_7 F0_8 F0_9 F0_10 F0_11 F0_12 F0_13 F0_14 F0_15: library part "Fuse, 0805", "Generic 0805 Fuse", Manufacturer_Part_Number=MFU0805FF01000P100, Built_By=EMA_UL_Team, ClassName=CellFuses, Copyright="Copyright (C) 2018 Accelerated Designs. All rights reserved", RefDes=RefDes, SourceLibrary=Vishay_2010-01-01_FUSE_MFU, Type=DEV, Vendor=VISHAY
J0: "Molex 3 Position Board Header, RIght Angle", Manufacturer=Molex, Voltage=600V, ComponentLink1Description=Datasheet, ComponentLink1URL=http://www.mouser.com/ds/2/418/NG_CD_1445088_A1-614413.pdf, PartNumber=43650-0309, Published=13Aug2018, Publisher=T.Tallo, Status=Active, TargetLibrary=RITRacing-Connectors
J0_1 J0_2 J0_3 J0_4 J0_5 J0_6 J0_7 J0_8 J0_9 J0_10 J0_11 J0_12 J0_13 J0_14 J0_15 J1_1 J1_2 J1_3 J1_4 J1_5 J1_6 J1_7 J1_8 J1_9 J1_10 J1_11 J1_12 J1_13 J1_14 J1_15 J3 J4: library part "4 Pin Thru Hole", "Mill Max Spring Contact", ClassName=SpringContacts, ComponentLink1Description=Datasheet, ComponentLink1URL=https://www.mill-max.com/products/datasheet/pinsrecs/0908-6-15-20-75-14-11-0
J1: "Molex 2 Position Board Header, RIght Angle", Manufacturer=Molex, Voltage=600V, ComponentLink1Description=Datasheet, ComponentLink1URL=http://www.mouser.com/ds/2/418/NG_CD_1445088_A1-614413.pdf, PartNumber=43650-0209, Published=13Aug2018, Publisher=T.Tallo, Status=Active, TargetLibrary=RITRacing-Connectors
J2: "Molex 6 Position Board Header, RIght Angle", Manufacturer=Molex, Voltage=600V, ComponentLink1Description=Datasheet, ComponentLink1URL=http://www.mouser.com/ds/2/418/NG_CD_1445088_A1-614413.pdf, PartNumber=43650-0609, Published=13Aug2018, Publisher=T.Tallo, Status=Active, TargetLibrary=RITRacing-Connectors
L0 L1: library part CMP-06045-000059-1, "CMC 100UH 200MA 2LN SMD AEC-Q200", Case Code (Imperial)=1812, Case Code (Metric)=4532, Current=200mA, DC Resistance (DCR)=2R, Inductance=100uH, Max Operating Temperature=125°C, Min Operating Temperature=-40°C, Package Quantity=1, Test Frequency=1MHz, Tolerance=50%, Voltage Rating=50V, Case/Package=1812, Current Rating=200mA, DC Current=200mA, Depth=3.4mm, Height=2.6mm, Lead Free="Lead Free", Length=4.5mm, Max DC Current=200mA, Military Standard=Not, Mount="Surface Mount", Number of Lines=2, Packaging="Tape and Reel", Radiation Hardening=No, REACH SVHC="No SVHC", Shielding=Unshielded, Termination=SMD/SMT, Weight=0.005997oz, Width=0.126inch
M0_1 M0_2 M0_3 M0_4 M0_5 M0_6 M0_7 M0_8 M0_9 M0_10 M0_11 M0_12 M0_13 M0_14 M0_15: "MOSFET P-CH 20V 1A SSOT3", Manufacturer 1="ON Semiconductor", Supplier Part Number 1=NDS332PCT-ND, ClassName=Mosfets, ComponentLink1Description=https://datasheet.ciiva.com/931/nds332p-931840.pdf?src-supplier=Digi-Key, ComponentLink1URL=https://datasheet.ciiva.com/931/nds332p-931840.pdf?src-supplier=Digi-Key, ComponentLink2Description=https://datasheet.ciiva.com/22681/1815140-22681925.pdf?src-supplier=Element14, ComponentLink2URL=https://datasheet.ciiva.com/22681/1815140-22681925.pdf?src-supplier=Element14, ComponentLink3Description=https://datasheet.ciiva.com/19479/874752-19479886.pdf?src-supplier=Jameco, ComponentLink3URL=https://datasheet.ciiva.com/19479/874752-19479886.pdf?src-supplier=Jameco, ComponentLink4Description=https://datasheet.ciiva.com/4441/nds332p-96390-4441376.pdf?src-supplier=Mouser, ComponentLink4URL=https://datasheet.ciiva.com/4441/nds332p-96390-4441376.pdf?src-supplier=Mouser, ComponentLink5Description=https://datasheet.ciiva.com/6037/192744-6037617.pdf?src-supplier=Farnell, ComponentLink5URL=https://datasheet.ciiva.com/6037/192744-6037617.pdf?src-supplier=Farnell, ComponentLink6Description=https://datasheet.ciiva.com/22681/1815140-22681813.pdf?src-supplier=Element14, ComponentLink6URL=https://datasheet.ciiva.com/22681/1815140-22681813.pdf?src-supplier=Element14, ComponentLink7Description=https://datasheet.ciiva.com/22681/1815140-22681814.pdf?src-supplier=Element14, ComponentLink7URL=https://datasheet.ciiva.com/22681/1815140-22681814.pdf?src-supplier=Element14, ComponentLink8Description=https://datasheet.ciiva.com/22681/1815140-22681815.pdf?src-supplier=Element14, ComponentLink8URL=https://datasheet.ciiva.com/22681/1815140-22681815.pdf?src-supplier=Element14, ComponentLink9Description=https://datasheet.ciiva.com/931/nds332p-931841.pdf?src-supplier=Digi-Key, ComponentLink9URL=https://datasheet.ciiva.com/931/nds332p-931841.pdf?src-supplier=Digi-Key, ComponentLink10Description=https://datasheet.ciiva.com/6037/192744-6037734.pdf?src-supplier=Farnell, ComponentLink10URL=https://datasheet.ciiva.com/6037/192744-6037734.pdf?src-supplier=Farnell, ComponentLink11Description=https://datasheet.ciiva.com/16772/nds332p-16772443.pdf?src-supplier=Future+Electronics, ComponentLink11URL=https://datasheet.ciiva.com/16772/nds332p-16772443.pdf?src-supplier=Future+Electronics, ComponentLink12Description=https://datasheet.ciiva.com/8114/nds332p-8114766.pdf?src-supplier=Avnet, ComponentLink12URL=https://datasheet.ciiva.com/8114/nds332p-8114766.pdf?src-supplier=Avnet, Manufacturer Part Number 1=NDS332P, Pricing 1="1=0.37000, 10=0.29600, 100=0.20180, 500=0.15132, 1000=0.11349 (USD)", RoHS=No, Stock 1=103711, Supplier 1=Digi-Key
Q0 Q1: library part CMP-1048-00450-1, "100 V, 2 A, Low VCE(sat), NPN Transistor, 4-Pin SOT-223, Pb-Free, Tape and Reel", Manufacturer="On Semiconductor", ComponentLink1Description="Manufacturer URL", ComponentLink1URL=http://www.onsemi.com/, ComponentLink2Description=Datasheet, ComponentLink2URL=http://www.onsemi.cn/pub_link/Collateral/NSS1C201MZ4-D.PDF, ComponentLink3Description="Package Specification", ComponentLink3URL=http://www.onsemi.com/pub_link/Collateral/318E-04.PDF, DatasheetVersion="Rev. 4", IC Continuous (A)=2, Mounting Technology="Surface Mount", Note1=0, PackageDescription="4-Pin Small Outline Transistor, Body 6.5 x 3.5 mm, Pitch 2.3 mm", PackageReference=SOT-223-4-318E-04, PackageVersion="Rev. N, 08/2009", Packing="Tape and Reel", PartNumber=NSV1C201MZ4T1G, Polarity=NPN, RoHS=TRUE
R0 R3 R32 R33 R38 R39 R41 R43: library part SFR16S0001000FR500, "Res Metal Film 100 Ohm 1% 1/2W 100ppm/C Conformal AXL Thru-Hole T/R", Case/Package=Axial, Manufacturer 1="Vishay BCcomponents", Max Operating Temperature=155°C, Max Power Dissipation=500mW, Min Operating Temperature=-55°C, Package Quantity=1, Resistance=100R, Resistance Tolerance=1%, Resistor Type="Metal Film", Temperature Coefficient=100ppm/°C, Voltage Rating=200V, Category="Through-Hole Resistors", ComponentLink1Description=https://datasheet.ciiva.com/2710/sfr16s25-2710549.pdf?src-supplier=Digi-Key, ComponentLink1URL=https://datasheet.ciiva.com/2710/sfr16s25-2710549.pdf?src-supplier=Digi-Key, ComponentLink2Description=https://datasheet.ciiva.com/16427/sfr16s25-16427365.pdf?src-supplier=Future+Electronics, ComponentLink2URL=https://datasheet.ciiva.com/16427/sfr16s25-16427365.pdf?src-supplier=Future+Electronics, ComponentLink3Description=https://datasheet.ciiva.com/2710/sfr16s25-2710550.pdf?src-supplier=Digi-Key, ComponentLink3URL=https://datasheet.ciiva.com/2710/sfr16s25-2710550.pdf?src-supplier=Digi-Key, ComponentLink4Description=https://datasheet.ciiva.com/28605/1911160-28605898.pdf?src-supplier=Element14, ComponentLink4URL=https://datasheet.ciiva.com/28605/1911160-28605898.pdf?src-supplier=Element14, ComponentLink5Description=https://datasheet.ciiva.com/48523/sfr16s25-48523466.pdf?src-supplier=Avnet, ComponentLink5URL=https://datasheet.ciiva.com/48523/sfr16s25-48523466.pdf?src-supplier=Avnet, ComponentLink6Description=https://datasheet.ciiva.com/8321/sfr16s25-8321901.pdf?src-supplier=Avnet, ComponentLink6URL=https://datasheet.ciiva.com/8321/sfr16s25-8321901.pdf?src-supplier=Avnet, Contact Plating=Tin, Diameter=1.9mm, Lead Diameter=0.45mm, Lead Free="Lead Free", Length=0.138inch, Manufacturer Part Number 1=SFR16S0001000FR500, Mount="Through Hole", Number of Terminations=2, Packaging="Cut Tape", Power Rating=500mW, Pricing 1="1=0.19000, 10=0.15700, 25=0.11440, 50=0.08300, 100=0.06150, 250=0.04720, 500=0.03718, 1000=0.02574 (USD)", Radiation Hardening=No, REACH SVHC=Unknown, RoHS=Yes, RoHS Compliant=Yes, Series=SFR16S, Stock 1=3242, Supplier 1=Digi-Key, Termination=Axial, Tolerance=1%, Voltage Rating (DC)=200V
R0_1 R0_2 R0_3 R0_4 R0_5 R0_6 R0_7 R0_8 R0_9 R0_10 R0_11 R0_12 R0_13 R0_14 R0_15: library part CF18JT3K30, "RES 3.3K OHM 1/8W 5% AXIAL", Case/Package=Conformal, Manufacturer 1="Stackpole Electronics", Manufacturer Part Number 1=CFM14JT3K30, Max Operating Temperature=155°C, Max Power Dissipation=250mW, Min Operating Temperature=-55°C, Package Quantity=1, Resistance=3.3kR, Supplier Part Number 1=S3.3KQCT-ND, Temperature Coefficient=-400ppm/°C, Tolerance=5%, ClassName=GateRes, ComponentLink1Description=Digikey, ComponentLink1URL=https://www.digikey.com/en/products/detail/stackpole-electronics-inc/CF18JT3K30/1741665, ComponentLink2Description=Datasheet, ComponentLink2URL=https://www.seielect.com/catalog/sei-cf_cfm.pdf, Composition="Carbon Film", Contact Plating=Tin,Matte, Diameter=1.7mm, Features="Flame Retardant Coating", Length=3.3mm, Military Standard=Not, Mount="Through Hole,Axial", Number of Terminations=2, Packaging="Tape and Reel", Pricing 1="1=0.10000, 10=0.04100, 25=0.03000, 50=0.02280, 100=0.01690, 250=0.01288, 500=0.01030, 1000=0.00758 (USD)", Radiation Hardening=No, RoHS=Yes, Stock 1=33623, Supplier 1=Digi-Key, Termination=Axial
R1_1 R1_2 R1_3 R1_4 R1_5 R1_6 R1_7 R1_8 R1_9 R1_10 R1_11 R1_12 R1_13 R1_14 R1_15 R2 R14 R42 R58: library part RNF18FTD100R, "RES 100 OHM 1/8W 1% AXIAL", Case/Package=Axial, Manufacturer 1="Vishay BCcomponents", Manufacturer Part Number 1=MRS25000C1000FRP00, Max Operating Temperature=155°C, Max Power Dissipation=600mW, Min Operating Temperature=-55°C, Package Quantity=1, Supplier Part Number 1=PPC100ZCT-ND, Temperature Coefficient=50ppm/°C, Tolerance=1%, Voltage Rating=350V, ComponentLink1Description=Digikey, ComponentLink1URL=https://www.digikey.com/en/products/detail/stackpole-electronics-inc/RNF18FTD100R/1682751, ComponentLink2Description=Datasheet, ComponentLink2URL=https://www.seielect.com/catalog/sei-rnf_rnmf.pdf, Composition="Metal Film,Thin Film", Contact Plating=Tin, Diameter=2.5mm, Lead Diameter=0.6mm, Lead Free="Lead Free", Length=6.5mm, Military Standard=Not, Mount="Through Hole", Number of Pins=2, Number of Terminations=2, Packaging="Tape and Reel", Power Rating=600mW, Pricing 1="1=0.29000, 10=0.24200, 25=0.17600, 50=0.12760, 100=0.09460, 250=0.07260, 500=0.05720, 1000=0.03960 (USD)", Radiation Hardening=No, REACH SVHC=Unknown, Resistance=100R, RoHS=Yes, Stock 1=99591, Supplier 1=Digi-Key, Termination=Axial, Voltage Rating (DC)=350V, Width=2.5mm
  R1_1 R1_2 R1_3 R1_4 R1_5 R1_6 R1_7 R1_8 R1_9 R1_10 R1_11 R1_12 R1_13 R1_14 R1_15 R14: ClassName=CellRes
R2_1 R2_2 R2_3 R2_4 R2_5 R2_6 R2_7 R2_8 R2_9 R2_10 R2_11 R2_12 R2_13 R2_14 R2_15: library part RSF200JB-73-16R, "RES 16 OHM 2W 5% AXIAL", Case/Package=Axial, Manufacturer 1=Yageo, Max Operating Temperature=235°C, Max Power Dissipation=2W, Min Operating Temperature=-55°C, Package Quantity=100, Resistance=16R, Resistor Type="Metal Oxide", Tolerance=5%, Category="Through-Hole Resistors", ComponentLink1Description=https://datasheet.ciiva.com/2715/yageolr-rsf-2013-2715284.pdf?src-supplier=Digi-Key, ComponentLink1URL=https://datasheet.ciiva.com/2715/yageolr-rsf-2013-2715284.pdf?src-supplier=Digi-Key, Features="Flame Retardant Coating", Length=0.61inch, Manufacturer Part Number 1=RSF200JB-73-16R, Number of Terminations=2, Packaging=Bulk, Pricing 1="1=0.44000, 10=0.31700, 25=0.23440, 50=0.17300, 100=0.12690, 250=0.10484, 500=0.08646, 1000=0.06254, 5000=0.05243 (USD)", RoHS=Yes, Stock 1=2321, Supplier 1=Digi-Key
R3_1 R3_2 R3_3 R3_4 R3_5 R3_6 R3_7 R3_8 R3_9 R3_10 R3_11 R3_12 R3_13 R3_14 R3_15: library part CF18JT180R, "RES 180 OHM 1/8W 5% AXIAL", Case/Package=Conformal, Manufacturer 1="Stackpole Electronics", Max Operating Temperature=155°C, Max Power Dissipation=125mW, Min Operating Temperature=-55°C, Package Quantity=1, Resistor Type="Carbon Film", Temperature Coefficient=-400ppm/°C, Tolerance=5%, Category="Through-Hole Resistors", ComponentLink1Description=http://components.arrow.com/part/dataview/53468719S47843N1174?src-supplier=Arrow+Electronics, ComponentLink1URL=http://components.arrow.com/part/dataview/53468719S47843N1174?src-supplier=Arrow+Electronics, ComponentLink2Description=https://www.seielect.com/Catalog/SEI-CF_CFM.pdf?src-supplier=Digi-Key, ComponentLink2URL=https://www.seielect.com/Catalog/SEI-CF_CFM.pdf?src-supplier=Digi-Key, ComponentLink3Description=https://www.seielect.com/catalog/SEI-CF_CFM.pdf?src-supplier=Avnet, ComponentLink3URL=https://www.seielect.com/catalog/SEI-CF_CFM.pdf?src-supplier=Avnet, Construction=Cylindrical, Contact Plating=Tin,Matte, Diameter=1.7mm, Features="Flame Retardant Coating", Lead Free="Lead Free", Length=3.3mm, Manufacturer Part Number 1=CF18JT180R, Military Standard=Not, Mount="Through Hole,Axial", Number of Terminations=2, Packaging="Tape and Reel", Pricing 1="1=0.10000, 10=0.04500, 25=0.03240, 50=0.02480, 100=0.01830, 250=0.01396, 500=0.01116, 1000=0.00822 (USD)", Radiation Hardening=No, Resistance=180R, RoHS=Yes, RoHS Compliant=Yes, Series=CF, Stock 1=17216, Supplier 1=Digi-Key, Termination=Axial
R4 R44: library part CMP-2001-00346-1, Manufacturer=Panasonic, Part Number=ERJ-6GEYJ122V
R5 R45: library part CMP-1013-00072-2, Manufacturer=Panasonic, Part Number=ERJ-6GEYJ821V
R6 R7 R12 R13: library part MBA02040C3000FCT00, "Resistor 300 Ohm 0.4 W  ±  1 %, MBA02040C3000FCT00, Vishay", Case/Package=Conformal, Manufacturer 1="Vishay BCcomponents", Max Operating Temperature=155°C, Max Power Dissipation=400mW, Min Operating Temperature=-55°C, Package Quantity=5000, Resistor Type="Metal Film", Temperature Coefficient=50ppm/°C, Tolerance=1%, Category="Through-Hole Resistors", ComponentLink1Description=https://datasheet.ciiva.com/26315/ngmbx-sma-data-e-26315420.pdf?src-supplier=Distrelec, ComponentLink1URL=https://datasheet.ciiva.com/26315/ngmbx-sma-data-e-26315420.pdf?src-supplier=Distrelec, Construction=Cylindrical, Contact Plating=Tin, Diameter=1.6mm, Features="Automotive AEC-Q200", Lead Free="Lead Free", Length=3.6mm, Manufacturer Part Number 1=MBA02040C3000FCT00, Military Standard=Not, Mount="Through Hole", Number of Terminations=2, Packaging="Tape and Reel", Pricing 1="1=0.22000, 10=0.18300, 25=0.13280, 50=0.09620, 100=0.07140, 250=0.05480, 500=0.04316, 1000=0.02988 (USD)", Radiation Hardening=No, Resistance=300R, RoHS=Yes, RoHS Compliant=Yes, Series="MBA 0204 - Professional", Stock 1=4691, Supplier 1=Digi-Key, Termination=Axial
R8 R9 R10 R11: library part MBA02040C6209FC100, "Vishay MBA0204 Series Axial Thin Film Resistor 62 1% 0.4W 50ppm/C", Case/Package=Conformal, Manufacturer 1="Vishay BCcomponents", Max Operating Temperature=155°C, Max Power Dissipation=400mW, Min Operating Temperature=-55°C, Resistor Type="Thin Film", Temperature Coefficient=50ppm/°C, Tolerance=1%, Category="Through-Hole Resistors", ComponentLink1Description=http://components.arrow.com/part/dataview/0323_04156409?src-supplier=Arrow+Europe, ComponentLink1URL=http://components.arrow.com/part/dataview/0323_04156409?src-supplier=Arrow+Europe, ComponentLink2Description=http://www.vishay.com/docs/28766/28766.pdf?src-supplier=Avnet+Europe, ComponentLink2URL=http://www.vishay.com/docs/28766/28766.pdf?src-supplier=Avnet+Europe, ComponentLink3Description=http://www.vishay.com/docs/28766/28766.pdf?src-supplier=Avnet, ComponentLink3URL=http://www.vishay.com/docs/28766/28766.pdf?src-supplier=Avnet, Contact Plating=Tin, Diameter=1.6mm, Features="Automotive AEC-Q200", Lead Free="Lead Free", Length=3.6mm, Manufacturer Part Number 1=MBA02040C6209FC100, Military Standard=Not, Mount="Through Hole", Number of Terminations=2, Packaging="Tape and Reel", Power Rating=400mW, Pricing 1="1=0.40000, 10=0.28600, 100=0.11450 (USD)", Radiation Hardening=No, Resistance=62R, RoHS=Yes, Stock 1=1794, Supplier 1=Digi-Key, Termination=Axial
R35 R36 R37: library part CMP-2001-00478-1, Manufacturer=Panasonic, Part Number=ERJ-P06J103V
T0 T1 T2: "No Description Available", Built_By=EMA_Cory, Copyright="Copyright (C) 2018 Accelerated Designs. All rights reserved", Manufacturer_Part_Number=PE-68386NLT, RefDes=RefDes, SourceLibrary=Pulse_Electronics_2019-12-18, Type=DEV, Vendor="Pulse Electronics Corporation"
U0 U1: library part CMP-0471-00242-1, "Multicell Battery Monitor, 60 V Vin MAX, 48-pin SOP (G-48), -40 to 125 degC, Pb-Free, Tape and Reel", Manufacturer="Linear Technology", Battery Chemistry="Li-Ion, Li-Polymer, NiMH", ComponentLink1Description="Manufacturer URL", ComponentLink1URL=http://www.linear.com/, ComponentLink2Description=Datasheet, ComponentLink2URL=http://cds.linear.com/docs/en/datasheet/680412f.pdf, ComponentLink3Description="Package Specification", ComponentLink3URL=http://cds.linear.com/docs/en/packaging/05081887_0_G48.pdf, Mounting Technology="Surface Mount", Number of Cells="> 1000 V of stacked Li-Ion cells", PackageDescription="48-Pin Plastic SSOP, Body 12.8 x 5.3 mm, Pitch 0.5 mm", PackageReference=G-48, PackageVersion="Rev. Ã˜, 01/2011", Packing="Tape and Reel", PartNumber=LTC6804HG-1#TRPBF, RoHS=TRUE, Type of Charger="Battery Stack Monitor", Vin Max(V)=60

## Free pads (board coordinates)
  round 4.064 hole 2.845: 11(97.028,126.238) 12(97.028,34.163) 13(64.643,105.283) 14(64.643,8.001)

## Via types
v1: diameter 0.61, hole 0.305, Top Layer to Bottom Layer, 59 vias

## Nets (pads, with @x,y where several pads share a name; then routed paths per layer and width w, separated by ;. In a path a pad name is that pad's centre, name@x,y a point inside that pad or via, vN(x,y) a via of type N, cw(c..) or ccw(c..) an arc to the next point about the centre after c; other vN are vias at no path point)
1-C1: C0_14.1 C0_15.2 R1_15.1 U0.24 | length 100.5
  Top Layer w0.254: U0.24@75.295,42.164 75.295,36.135 87.3,24.13 C0_14.1@98.812,24.13 ; R1_15.1@148.209,45.847 151.257,45.847 C0_15.2@152.019,45.085
  Bottom Layer w0.254: C0_14.1@98.812,24.13 105.238,30.556 137.49,30.556 C0_15.2@152.019,45.085
1-C2: C0_13.1 C0_14.2 R1_14.1 U0.22 | length 86.9
  Top Layer w0.254: U0.22@74.295,42.164 74.295,43.485 74.549,43.739 75.565,43.739 77.038,42.266 77.038,36.347 87.939,25.447 R1_14.1@103.759,25.447 98.812,20.5 C0_14.2@98.812,19.05
  Bottom Layer w0.254: C0_13.1@62.865,19.05 63.564,19.749 74.154,19.749 74.854,19.05 C0_14.2@98.812,19.05
1-C3: C0_12.1 C0_13.2 R1_13.1 U0.20 | length 76.5
  Top Layer w0.254: C0_13.2@62.865,13.97 65.761,16.866 65.761,25.298 73.295,32.833 U0.20@73.295,42.164
  Bottom Layer w0.254: C0_12.1@34.003,24.13 36.373,21.76 55.075,21.76 C0_13.2@62.865,13.97 64.795,12.04 70.968,12.04 R1_13.1@72.39,13.462
1-C4: C0_12.2 R1_12.1 U0.18 | length 51.5
  Top Layer w0.254: C0_12.2@34.003,19.05 35.527,19.05 R1_12.1@40.988,24.511 50.665,34.188 70.482,34.188 72.295,36.002 U0.18@72.295,42.164
1-C7: C0_10.1 C0_11.2 R1_11.1 U0.12 | length 111.8
  Top Layer w0.254: C0_11.2@23.495,57.658 23.495,54.991 R1_11.1@24.257,54.229 ; U0.12@69.295,42.164 69.295,43.739 69.955,44.399 v1(76.2,44.399)
  Bottom Layer w0.254: R1_11.1@24.257,54.229 25.781,52.705 25.781,50.063 ; C0_10.1@47.879,51.482 46.123,53.238 28.956,53.238 25.781,50.063 ; v1(76.2,44.399) 76.2,37.694 73.177,34.671 33.528,34.671 24.46,43.739 24.46,48.743 25.781,50.063